# Altium PCB ife18_TS_BMS_Master_STM32.PcbDoc
Units mm, origin at the board's own origin, x right, y up, seen from the top; angles counter-clockwise.
Board outline 106.9 x 63 mm, 2 copper layers (Top Layer, Bottom Layer); 91 components, 78 nets, 391 pads, 110 vias.
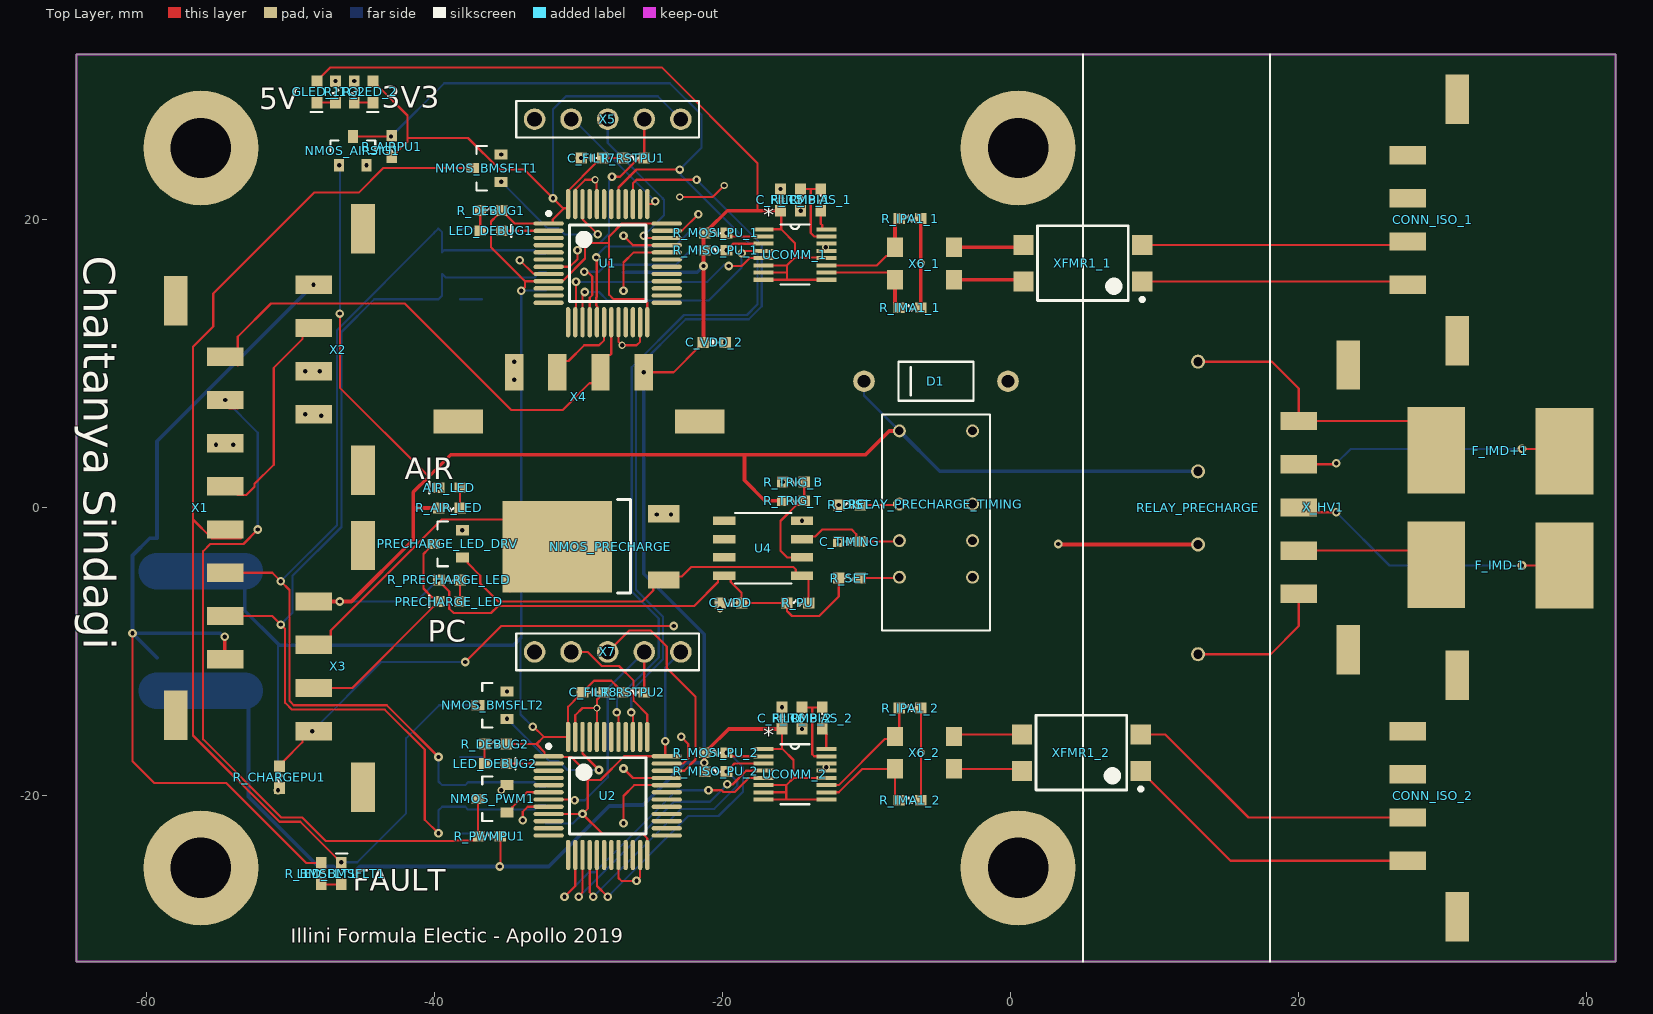
[diagram p0: Top Layer view]
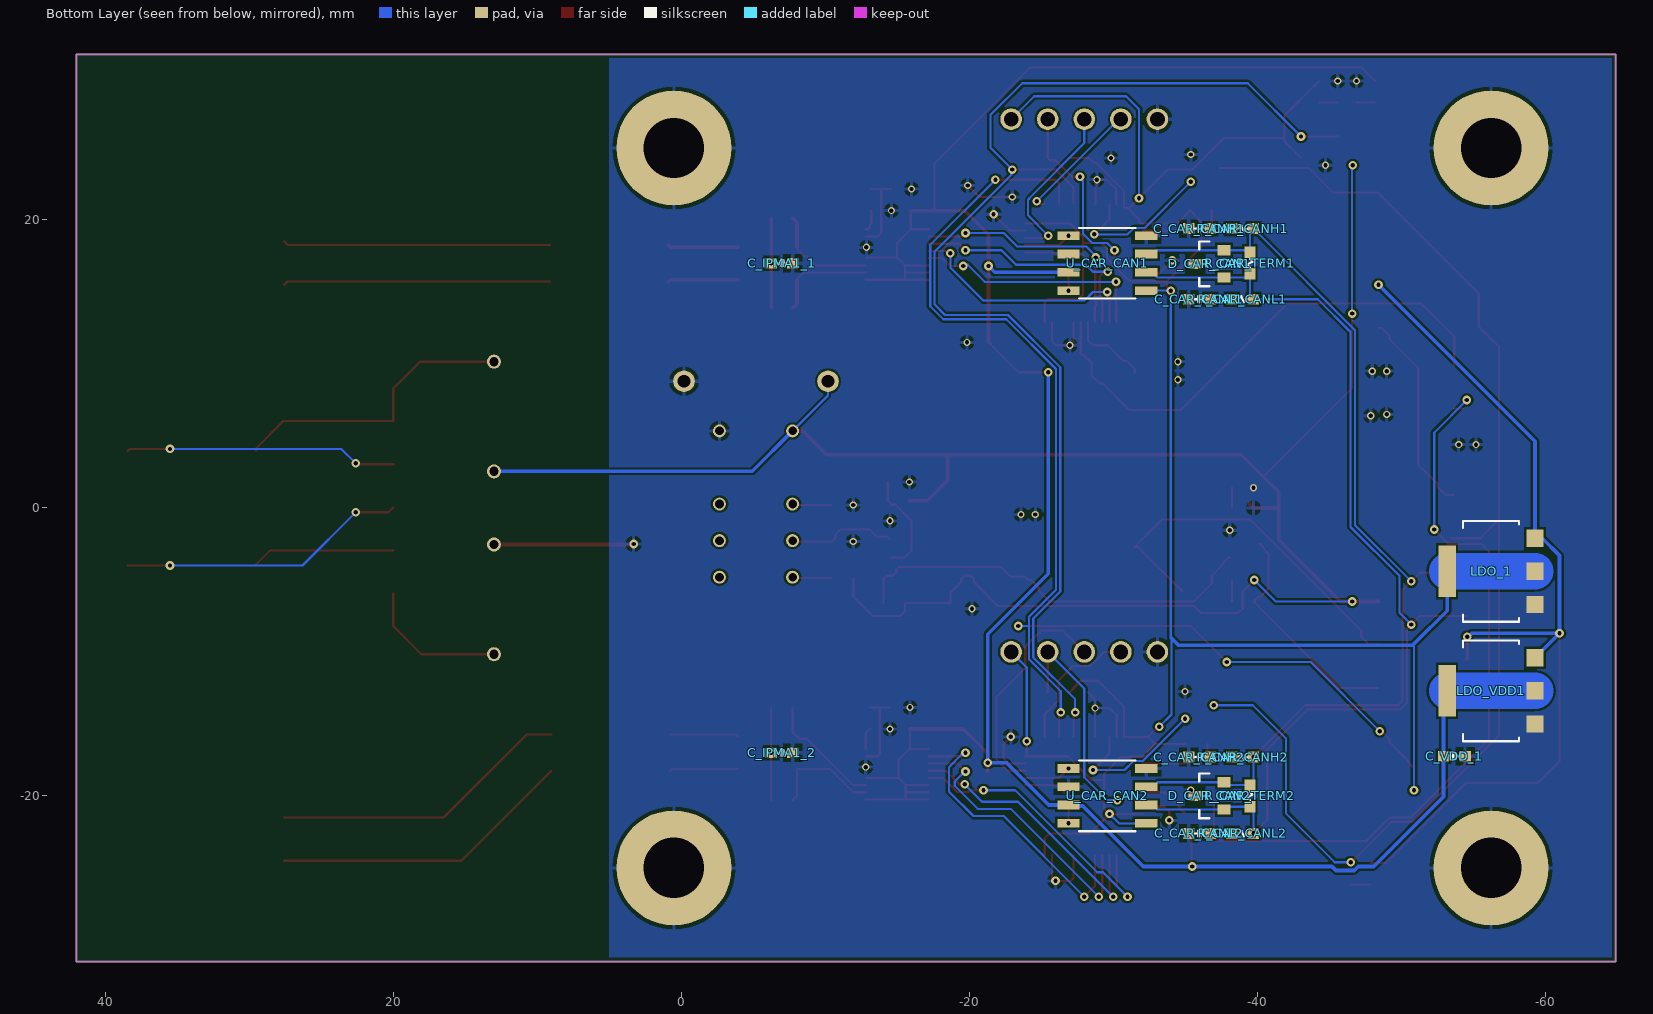
[diagram p1: Bottom Layer view, seen from below]
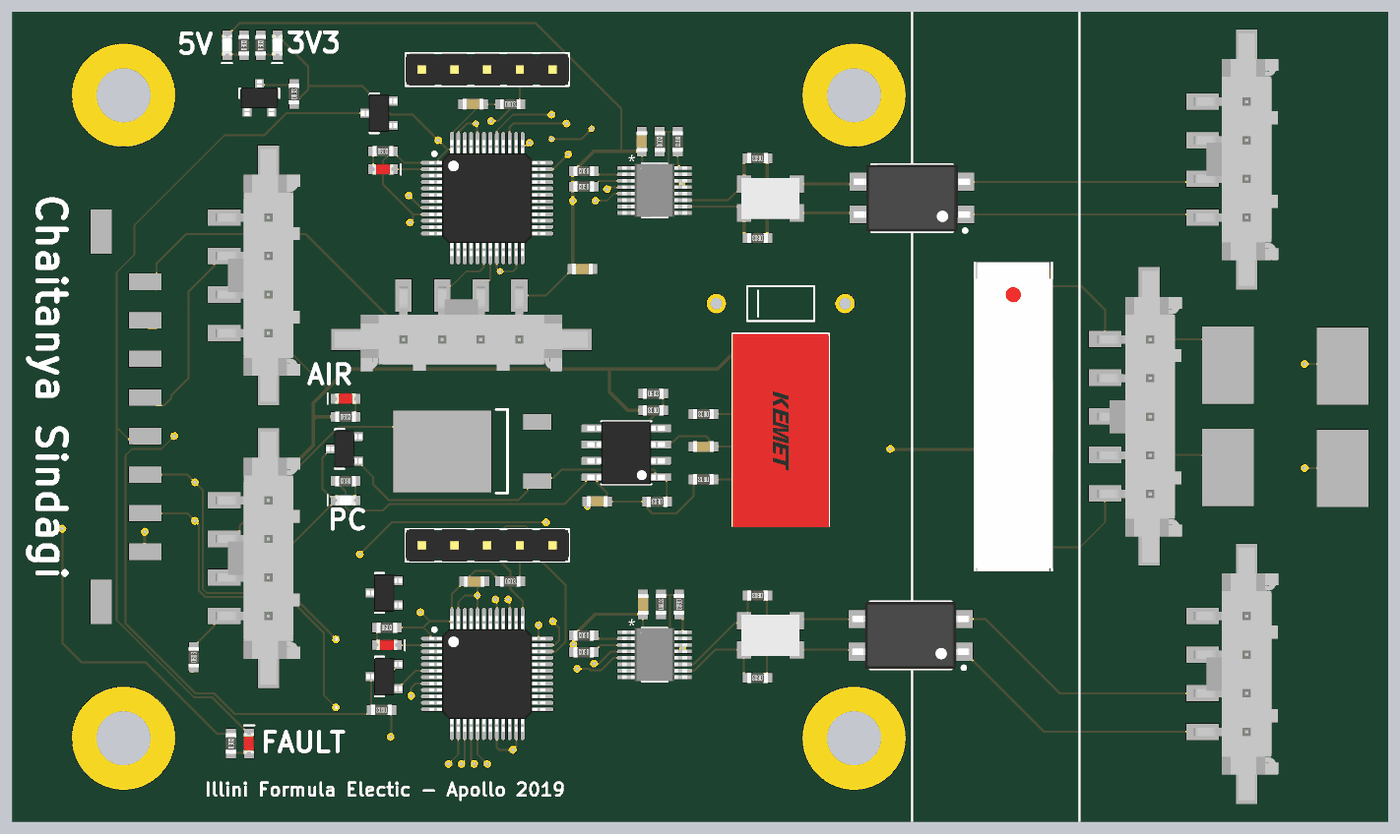
[diagram p2: 3D render of the assembled board from above, using the file's embedded part models]
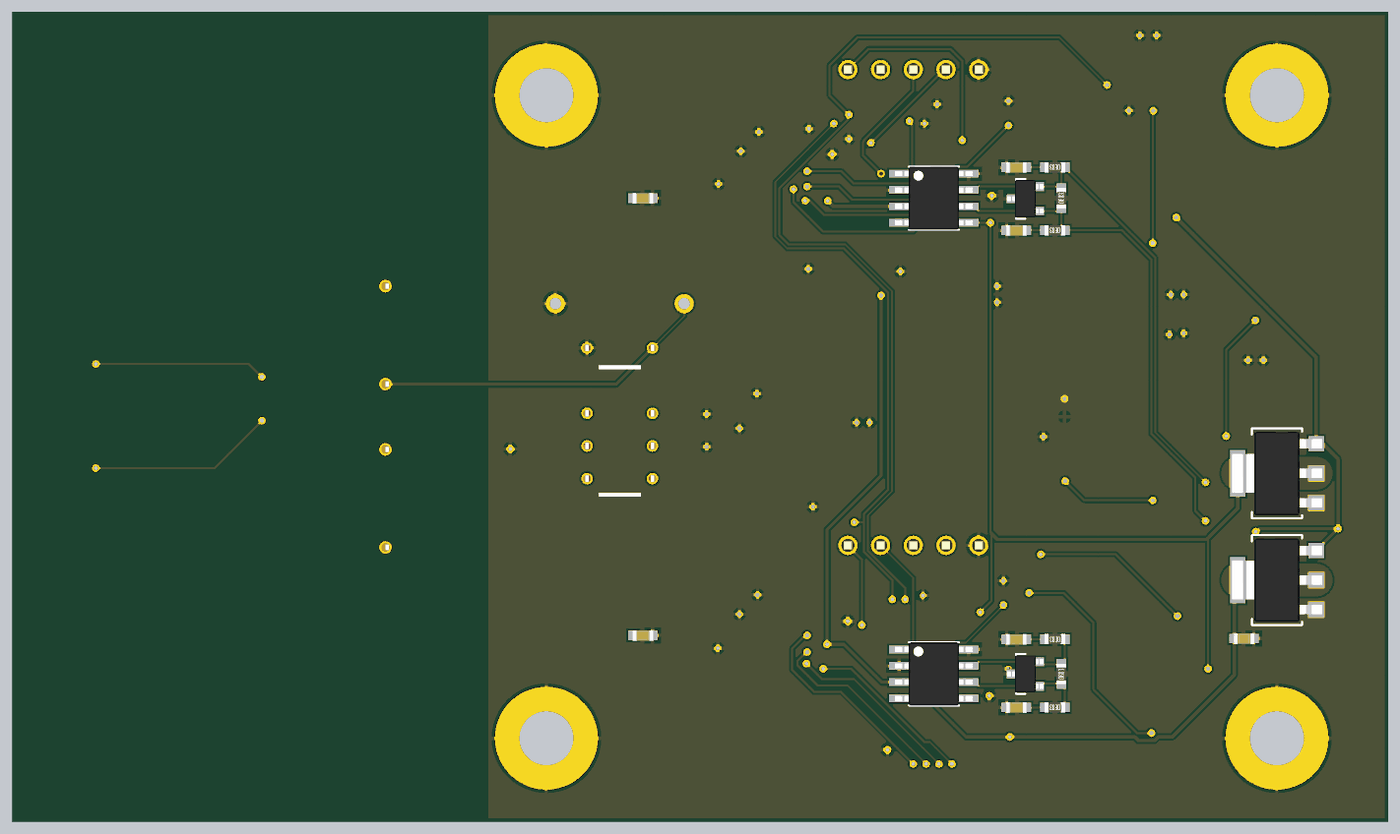
[diagram p3: 3D render of the assembled board from below, using the file's embedded part models]

## Layer stack, top to bottom
Top Solder: solder mask 0.0102, Solder Resist, Dk 3.5
Top Layer: signal copper 0.0356
Dielectric 1: dielectric 0.32, FR-4, Dk 4.8
Bottom Layer: signal copper 0.0356
Bottom Solder: solder mask 0.0102, Solder Resist, Dk 3.5

## Board outline
-64.9,-31.5 -64.9,31.5 42,31.5 42,-31.5

## Design rules (kind name [scope] priority, off if disabled: settings)
BoardOutlineClearance [All] p1: gap=0.2 ignorepadtopadclearanceinfootprint=FALSE
Clearance "Board Outline" [OnLayer('Keep-Out Layer')] p1: gap=0.2 ignorepadtopadclearanceinfootprint=FALSE
Clearance "Tractive Net Class" [InNetClass('Tractive')] p2: gap=0.8 ignorepadtopadclearanceinfootprint=FALSE
Clearance [NOT InNetClass('Tractive')] p3: gap=0.152 ignorepadtopadclearanceinfootprint=FALSE
HoleSize [All] p1: absolutevalues=TRUE maxlimit=6.3 minlimit=0.3 maxpercent=80.000 minpercent=20.000
MinimumAnnularRing [All] p1: minimumring=0.076
MinimumSolderMaskSliver [All] p1: minsoldermaskwidth=0
PolygonConnect "SOT223 Planes" [HasFootprint('SOT223')] p1: connectstyle=Direct reliefconductorwidth=0.254 reliefentries=4 polygonreliefangle="90 Angle" airgapwidth=0.254
PolygonConnect [All] p2: connectstyle=Relief reliefconductorwidth=0.254 reliefentries=4 polygonreliefangle="90 Angle" airgapwidth=0.254
RoutingVias [All] p1: holewidth=0.3 width=0.6 viastyle="Through Hole" minholewidth=0.3 minwidth=0.6 maxholewidth=6.3 maxwidth=10
SilkToSilkClearance [All] p1: silktosilkclearance=0
SilkToSolderMaskClearance [IsPad] p1: minsilkscreentomaskgap=0 clearancetoexposedcopper=TRUE
SolderMaskExpansion [All] p1: expansion=0.051
Width [All] p1: maxlimit=2.54 minlimit=0.152 preferedwidth=0.254
26 further rules are at their usual default settings.

## Classes and differential pairs
component class 2: C_IPMA1_2 C_VDD_2 CONN_ISO_2 R_IBIAS_2 R_ICMP_2 R_IMA1_2 R_IPA1_2 R_MISO_PU_2 R_MOSI_PU_2 UCOMM_2 X6_2 XFMR1_2
component class 1: C_IPMA1_1 C_VDD_1 CONN_ISO_1 R_IBIAS_1 R_ICMP_1 R_IMA1_1 R_IPA1_1 R_MISO_PU_1 R_MOSI_PU_1 UCOMM_1 X6_1 XFMR1_1
component class Master: C_CAR_CANH1 C_CAR_CANH2 C_CAR_CANL1 C_CAR_CANL2 C_FILT5 C_FILT6 C_FILT7 C_FILT8 D_CAR_CAN1 D_CAR_CAN2 F_IMD+1 F_IMD-1 GLED_1 GLED_2 LDO_1 LDO_VDD1 LED_BMSFLT1 LED_DEBUG1 LED_DEBUG2 NMOS_AIRSIG1 NMOS_BMSFLT1 NMOS_BMSFLT2 NMOS_PWM1 R_1 R_2 R_AIRPU1 R_BMSFLT1 R_CAR_CANH1 R_CAR_CANH2 R_CAR_CANL1 R_CAR_CANL2 R_CAR_TERM1 R_CAR_TERM2 R_CHARGEPU1 R_DEBUG1 R_DEBUG2 R_PWMPU1 R_RSTPU1 R_RSTPU2 U1 U2 U_CAR_CAN1 U_CAR_CAN2 X1 X2 X3 X4 X5 X7 X_HV1
channel class Comms: U_Comms1 U_Comms2
net class Tractive: HV+ HV- IM_ISO_1 IM_ISO_2 IMD+ IMD- IP_ISO_1 IP_ISO_2 Precharge+
component class U_Precharge: AIR_LED C_TIMING C_VDD D1 NMOS_PRECHARGE PRECHARGE_LED PRECHARGE_LED_DRV R_AIR_LED R_DIST R_PRECHARGE_LED R_PU R_SET R_TRIG_B R_TRIG_T RELAY_PRECHARGE RELAY_PRECHARGE_TIMING U4

## Components (designator, comment, footprint, x,y, rotation, side; value= is the part's Value field where it differs from the comment)
AIR_LED "" LEDRED-0603 -39,1.4 r180 top
C_CAR_CANH1 "560p" CAP-0603 -36,19.4 r0 bottom
C_CAR_CANH2 "560p" CAP-0603 -36,-17.3 r0 bottom
C_CAR_CANL1 "560p" CAP-0603 -36,14.5 r0 bottom
C_CAR_CANL2 "560p" CAP-0603 -36,-22.6 r0 bottom
C_FILT5 "1u" CAP-0603 -16,21.4 r270 top
C_FILT6 "1u" CAP-0603 -15.9,-14.6 r270 top
C_FILT7 "1u" CAP-0603 -29.1,24.3 r0 top
C_FILT8 "1u" CAP-0603 -29,-12.8 r180 top
C_IPMA1_1 "CAP 10n" CAP-0603 -7,17 r0 bottom (schematic designator C_IPMA1)
C_IPMA1_2 "CAP 10n" CAP-0603 -7,-17 r0 bottom (schematic designator C_IPMA1)
C_TIMING "33u" CAP-0603 -11.2,-2.33 r0 top
C_VDD "1u" CAP-0603 -19.45,-6.6 r0 top
C_VDD_1 "1u" CAP-0603 -53.7,-17.25 r0 bottom (schematic designator C_VDD)
C_VDD_2 "1u" CAP-0603 -20.6,11.5 r180 top (schematic designator C_VDD)
CONN_ISO_1 "Molex - Micro-Fit 3.0 Series connector,  3.00mm (0.118\") pitch header, 4 positions." 43650-0424 31,20 r90 top (schematic designator CONN_ISO)
CONN_ISO_2 "Molex - Micro-Fit 3.0 Series connector,  3.00mm (0.118\") pitch header, 4 positions." 43650-0424 31,-20 r90 top (schematic designator CONN_ISO)
D1 "" DO41-10 -5.2,8.8 r180 top
D_CAR_CAN1 "DIODE-SOT23_PESD1CAN" SOT23 -36.7,16.95 r90 bottom
D_CAR_CAN2 "DIODE-SOT23_PESD1CAN" SOT23 -36.7,-20 r90 bottom
F_IMD+1 "FUSE_885" FUSE_885 34,4 r0 top
F_IMD-1 "FUSE_885" FUSE_885 34,-4 r180 top
GLED_1 "" LEDGREEN-0603 -48.2,28.9 r270 top
GLED_2 "" LEDGREEN-0603 -44.3,28.9 r270 top
LDO_1 "3V3" SOT223 -56.25,-4.4 r90 bottom
LDO_VDD1 "5V" SOT223 -56.25,-12.7 r90 bottom
LED_BMSFLT1 "LEDRED-0603" LEDRED-0603 -46.5,-25.4 r90 top
LED_DEBUG1 "LEDRED-0603" LEDRED-0603 -36.1,19.25 r0 top
LED_DEBUG2 "LEDRED-0603" LEDRED-0603 -35.8,-17.749 r0 top
NMOS_AIRSIG1 "NMOS-SOT23" SOT23 -45.7,24.8 r0 top
NMOS_BMSFLT1 "NMOS-SOT23" SOT23 -36.4,23.6 r90 top
NMOS_BMSFLT2 "NMOS-SOT23" SOT23 -36,-13.7 r90 top
NMOS_PRECHARGE "NMOS-TO252" TO252 -31.509,-2.721 r90 top
NMOS_PWM1 "NMOS-SOT23" SOT23 -36,-20.2 r90 top
PRECHARGE_LED "" LEDGREEN-0603 -39,-6.5 r180 top
PRECHARGE_LED_DRV "" SOT23 -39.1,-2.5 r90 top
R_1 "200" RES-0603 -46.9,28.9 r90 top
R_2 "200" RES-0603 -45.6,28.9 r90 top
R_AIR_LED "1K" RES-0603 -39,0 r0 top
R_AIRPU1 "10K" RES-0603 -43,25.1 r90 top
R_BMSFLT1 "860" RES-0603 -47.9,-25.4 r90 top
R_CAR_CANH1 "100" RES-0603 -39,19.4 r0 bottom
R_CAR_CANH2 "100" RES-0603 -39,-17.3 r0 bottom
R_CAR_CANL1 "100" RES-0603 -39,14.5 r0 bottom
R_CAR_CANL2 "100" RES-0603 -39,-22.6 r0 bottom
R_CAR_TERM1 "120" RES-0603 -39.5,17 r90 bottom
R_CAR_TERM2 "120" RES-0603 -39.5,-20 r90 bottom
R_CHARGEPU1 "10K" RES-0603 -50.8,-18.7 r90 top
R_DEBUG1 "860" RES-0603 -36.1,20.65 r0 top
R_DEBUG2 "860" RES-0603 -35.8,-16.4 r0 top
R_DIST "1.5K" RES-0603 -11.2,0.21 r180 top
R_IBIAS_1 "1.2K" RES-0603 -13.2,21.4 r270 top (schematic designator R_IBIAS)
R_IBIAS_2 "1.2K" RES-0603 -13.1,-14.6 r270 top (schematic designator R_IBIAS)
R_ICMP_1 "800" RES-0603 -14.6,21.4 r90 top (schematic designator R_ICMP)
R_ICMP_2 "800" RES-0603 -14.5,-14.6 r90 top (schematic designator R_ICMP)
R_IMA1_1 "60.4" RES-0603 -7,13.9 r180 top (schematic designator R_IMA1)
R_IMA1_2 "60.4" RES-0603 -7,-20.3 r180 top (schematic designator R_IMA1)
R_IPA1_1 "60.4" RES-0603 -7,20.1 r180 top (schematic designator R_IPA1)
R_IPA1_2 "60.4" RES-0603 -7,-13.9 r180 top (schematic designator R_IPA1)
R_MISO_PU_1 "1K" RES-0603 -20.5,17.9 r180 top (schematic designator R_MISO_PU)
R_MISO_PU_2 "1K" RES-0603 -20.5,-18.3 r180 top (schematic designator R_MISO_PU)
R_MOSI_PU_1 "1K" RES-0603 -20.5,19.1 r180 top (schematic designator R_MOSI_PU)
R_MOSI_PU_2 "1K" RES-0603 -20.5,-17 r180 top (schematic designator R_MOSI_PU)
R_PRECHARGE_LED "1K" RES-0603 -39,-5 r180 top
R_PU "10K" RES-0603 -14.8,-6.6 r180 top
R_PWMPU1 "10K" RES-0603 -36.2,-22.8 r180 top
R_RSTPU1 "10K" RES-0603 -26.21,24.3 r0 top
R_RSTPU2 "10K" RES-0603 -26.21,-12.8 r0 top
R_SET "220K" RES-0603 -11.2,-4.87 r180 top
R_TRIG_B "6.3K" RES-0603 -15.1,1.8 r0 top
R_TRIG_T "3.7K" RES-0603 -15.1,0.5 r180 top
RELAY_PRECHARGE "COTO9104" 9104-SIP4 13,0 r270 top
RELAY_PRECHARGE_TIMING "" RELAY-DPDT_EC2 -5.2,-1 r270 top
U1 "IC-LQFP48_STM32F103C8T6" STM-LQFP48_M -28,17 r0 top
U2 "IC-LQFP48_STM32F103C8T6" STM-LQFP48_M -28,-20 r0 top
U4 "" SOIC8 -17.2,-2.8 r90 top
U_CAR_CAN1 "IC-SOIC8_MCP2562" SOIC8 -29.6,17 r270 bottom
U_CAR_CAN2 "IC-SOIC8_MCP2562" SOIC8 -29.6,-20 r270 bottom
UCOMM_1 "IC-MSOP16_LTC6820" MSOP16 -15,17.6 r0 top (schematic designator UCOMM)
UCOMM_2 "IC-MSOP16_LTC6820" MSOP16 -15,-18.5 r0 top (schematic designator UCOMM)
X1 "Molex - Micro-Fit 3.0 Series connector,  3.00mm (0.118\") pitch header, 8 positions." 43650-0824 -58,0 r270 top
X2 "Molex - Micro-Fit 3.0 Series connector,  3.00mm (0.118\") pitch header, 4 positions." 43650-0424 -45,11 r90 top
X3 "Molex - Micro-Fit 3.0 Series connector,  3.00mm (0.118\") pitch header, 4 positions." 43650-0424 -45,-11 r90 top
X4 "Molex - Micro-Fit 3.0 Series connector,  3.00mm (0.118\") pitch header, 4 positions." 43650-0424 -30,6 r0 top
X5 "" POS5_254MM_MALE -28,27 r180 top
X6_1 "SRF4532-101Y" SRF4532 -6,16.975 r0 top (schematic designator X6)
X6_2 "SRF4532-101Y" SRF4532 -6,-17 r0 top (schematic designator X6)
X7 "" POS5_254MM_MALE -28,-10 r180 top
X_HV1 "Molex - Micro-Fit 3.0 Series connector,  3.00mm (0.118\") pitch header, 5 positions." 43650-0524 23.5,0 r90 top
XFMR1_1 "ESMIT-4180/A" ISOXFMR_ESMIT4180 5,17 r180 top (schematic designator XFMR1)
XFMR1_2 "ESMIT-4180/A" ISOXFMR_ESMIT4180 4.9,-17 r180 top (schematic designator XFMR1)

## Footprints (in the part's own frame and the unit in brackets; to place one, negate y for a bottom-side part, rotate by r counter-clockwise, add the part's x,y. Pads: shape width x height; smd on the part's side, far side on the other; paste and mask are expansions set on the pad)
9104-SIP4 [mm]
  round 0.975 / inner round 1.524 / far side round 0.975 hole 0.65: 1(-10.16,0) 3(-2.54,0) 5(2.54,0) 7(10.16,0)
  body extent -12.03,-3.23 12.03,2.97, height 8.14
43650-0424 [mm]
  rect 1.27x2.54 smd: P$1(4.5,3.43) P$2(1.5,3.43) P$3(-1.5,3.43) P$4(-4.5,3.43)
  rect 3.43x1.65 smd: TAB1(8.39,0) TAB2(-8.39,0)
  body extent -9.82,-2.47 9.83,4.1, height 9.95
43650-0524 [mm]
  rect 1.27x2.54 smd: P$1(6.036,3.503) P$2(3.036,3.503) P$3(0.036,3.503) P$4(-2.964,3.503) P$5(-5.964,3.503)
  rect 3.43x1.65 smd: TAB1(9.926,0.073) TAB2(-9.854,0.073)
  body extent -11.32,-2.47 11.32,4.1, height 9.95
43650-0824 [mm]
  rect 1.27x2.54 smd: P$1(10.5,3.43) P$2(7.5,3.43) P$3(4.5,3.43) P$4(1.5,3.43) P$5(-1.5,3.43) P$6(-4.5,3.43) P$7(-7.5,3.43) P$8(-10.5,3.43)
  rect 3.43x1.65 smd: TAB1(14.39,0) TAB2(-14.39,0)
CAP-0603 [mm]
  rect 0.8x0.75 smd: 1(-0.75,0) 2(0.75,0)
  silkscreen extent -0.3,-0.2 0.3,0.2, body extent -0.8,-0.4 0.8,0.42, height 0.81
DO41-10 [mm]
  round 1.5 hole 0.9: A(-5,0) K(5,0)
  silkscreen extent -2.6,-1.35 2.6,1.35, body extent -2.6,-1.34 2.6,1.35, height 2.85
FUSE_885 [mm]
  rect 4x6 smd: 1(-4.45,0) 2(4.45,-0.05)
  body extent -5.45,-2.4 5.45,2.4, height 4.95
ISOXFMR_ESMIT4180 [mm]
  rect 1.4x1.4 smd: 1(-4.125,1.27) 2(-4.125,-1.27) 3(4.125,-1.27) 4(4.125,1.27)
  silkscreen extent -4.25,-2.6 3.15,2.64, body extent -4.54,-2.6 4.54,2.6, height 3.5
LEDGREEN-0603 [mm]
  rect 0.8x0.75 smd: A(-0.75,0) K(0.75,0)
  silkscreen extent 1.4,-0.42 1.4,0.38, body extent -0.8,-0.4 0.8,0.4, height 0.53
LEDRED-0603 [mm]
  rect 0.8x0.75 smd: A(-0.75,0) K(0.75,0)
  silkscreen extent 1.4,-0.42 1.4,0.38, body extent -0.8,-0.4 0.8,0.4, height 0.53
MSOP16 [mil]
  rect 55x11 smd: 1(-86,68.95) 2(-86,49.25) 3(-86,29.55) 4(-86,9.85) 5(-86,-9.85) 6(-86,-29.55) 7(-86,-49.25) 8(-86,-68.95) 9(86,-68.95) 10(86,-49.25) 11(86,-29.55) 12(86,-9.85) 13(86,9.85) 14(86,29.55) 15(86,49.25) 16(86,68.95)
  silkscreen extent -39,-82 39,82, body extent -99,-81 100,82, height 43
POS5_254MM_MALE [mm]
  round 1.5 hole 1.02: P$1(-5.08,0) P$2(-2.54,0) P$3(0,0) P$4(2.54,0) P$5(5.08,0)
  silkscreen extent -6.35,-1.27 6.35,1.27, body extent -6.35,-1.24 6.35,1.25, height 8.54
RELAY-DPDT_EC2 [mm]
  round 0.9 / inner round 1.524 / far side round 0.9 hole 0.6: 1(-6.35,2.54) 3(-1.27,2.54) 4(1.27,2.54) 5(3.81,2.54) 8(3.81,-2.54) 9(1.27,-2.54) 10(-1.27,-2.54) 12(-6.35,-2.54)
  silkscreen extent -7.5,-3.75 7.5,3.75, body extent -7.4,-3.75 7.6,3.75, height 8.9
RES-0603 [mm]
  rect 0.8x0.75 smd: 1(-0.75,0) 2(0.75,0)
  silkscreen extent -0.3,-0.2 0.3,0.2, body extent -0.8,-0.4 0.8,0.4, height 0.44
SOIC8 [mm]
  rect 0.6x1.55 smd: 1(-1.905,-2.7) 2(-0.635,-2.7) 3(0.635,-2.7) 4(1.905,-2.7) 5(1.905,2.7) 6(0.635,2.7) 7(-0.635,2.7) 8(-1.905,2.7)
  silkscreen extent -2.45,-1.95 2.45,1.95, body extent -2.45,-3.01 2.45,3.01, height 1.5
SOT23 [mm]
  rect 0.7x0.9 smd: 1(-0.95,-1) 2(0.95,-1) 3(0,1)
  silkscreen extent -1.55,0 1.55,0.71, body extent -1.45,-1.41 1.45,1.41, height 1.5
SOT223 [mm]
  rect 1.2x1.2 smd: 1(-2.3,-3.05) 2(0,-3.05) 3(2.3,-3.05)
  rect 3.6x1.2 smd: 4(0,3.05)
  silkscreen extent -3.5,-1.95 3.5,1.95, body extent -3.25,-3.52 3.25,3.5, height 1.8
SRF4532 [mm]
  rect 1.1x1.35 smd: 1(-2.05,-1.125) 2(2.05,-1.125) 3(2.05,1.125) 4(-2.05,1.125)
  body extent -2.25,-1.6 2.25,1.6, height 2.8
STM-LQFP48_M [mm] "QFP, 48-Leads, Body 7x7mm, Pitch 0.5mm, IPC Low Density"
  oval 2.1x0.3 smd: 1(-4.1,2.75) 2(-4.1,2.25) 3(-4.1,1.75) 4(-4.1,1.25) 5(-4.1,0.75) 6(-4.1,0.25) 7(-4.1,-0.25) 8(-4.1,-0.75) 9(-4.1,-1.25) 10(-4.1,-1.75) 11(-4.1,-2.25) 12(-4.1,-2.75) 25(4.1,-2.75) 26(4.1,-2.25) 27(4.1,-1.75) 28(4.1,-1.25) 29(4.1,-0.75) 30(4.1,-0.25) 31(4.1,0.25) 32(4.1,0.75) 33(4.1,1.25) 34(4.1,1.75) 35(4.1,2.25) 36(4.1,2.75)
  oval 0.3x2.1 smd: 13(-2.75,-4.1) 14(-2.25,-4.1) 15(-1.75,-4.1) 16(-1.25,-4.1) 17(-0.75,-4.1) 18(-0.25,-4.1) 19(0.25,-4.1) 20(0.75,-4.1) 21(1.25,-4.1) 22(1.75,-4.1) 23(2.25,-4.1) 24(2.75,-4.1) 37(2.75,4.1) 38(2.25,4.1) 39(1.75,4.1) 40(1.25,4.1) 41(0.75,4.1) 42(0.25,4.1) 43(-0.25,4.1) 44(-0.75,4.1) 45(-1.25,4.1) 46(-1.75,4.1) 47(-2.25,4.1) 48(-2.75,4.1)
  silkscreen extent -4.22,-2.65 2.65,3.57, body extent -4.51,-4.51 4.51,4.51, height 1.55
TO252 [mm]
  rect 1.2x2.2 smd: 1(-2.279,-7.409) 3(2.321,-7.409)
  rect 6.35x7.62 smd: 2(0.021,-0.009)
  silkscreen extent -3.2,-5.09 3.3,-4.2, body extent -3.22,-7.29 3.28,1.41, height 2.3

## Part data
AIR_LED: library part LEDRED-0603
C_CAR_CANH1 C_CAR_CANH2 C_CAR_CANL1 C_CAR_CANL2 C_FILT5 C_FILT6 C_FILT7 C_FILT8 C_TIMING C_VDD C_VDD_1 C_VDD_2: library part CAP-0603
C_IPMA1_1 C_IPMA1_2: library part CAP-0603, "CAP-0603"
CONN_ISO_1 CONN_ISO_2 X2 X3 X4: library part POS4_MF43650-0424, Package=43650-0424, DeviceName=43650-0424, DeviceSetName=HEADER_POS4_?, GateName_1=G$1, LibraryName="MOLEX Micro-Fit", SymbolName_1=HEADER_POS4
D1: library part DIODE-DO41-10
GLED_1 GLED_2 PRECHARGE_LED: library part LEDGREEN-0603
LDO_1 LDO_VDD1: library part LDO-SOT223_SPX1117
NMOS_PRECHARGE: Package=TO252, DeviceSetName=DMP10H400SK3-13, GateName_1=G$1, LibraryName=IFE_Transistors, SymbolName_1=LABELED-PMOS
PRECHARGE_LED_DRV: library part NMOS-SOT23
R_1 R_2 R_AIR_LED R_AIRPU1 R_BMSFLT1 R_CAR_CANH1 R_CAR_CANH2 R_CAR_CANL1 R_CAR_CANL2 R_CAR_TERM1 R_CAR_TERM2 R_CHARGEPU1 R_DEBUG1 R_DEBUG2 R_DIST R_IBIAS_1 R_IBIAS_2 R_ICMP_1 R_ICMP_2 R_IMA1_1 R_IMA1_2 R_IPA1_1 R_IPA1_2 R_MISO_PU_1 R_MISO_PU_2 R_MOSI_PU_1 R_MOSI_PU_2 R_PRECHARGE_LED R_PU R_PWMPU1 R_RSTPU1 R_RSTPU2 R_SET R_TRIG_B R_TRIG_T: library part RES-0603
RELAY_PRECHARGE: Package=9104-SIP4, DeviceSetName=COTO9104, GateName_1=G$1, LibraryName=Discharge_Components_Altium_Export, SymbolName_1=SPST_REED
RELAY_PRECHARGE_TIMING: library part RELAY_EC2, Package=DPDT_2.54, DeviceSetName=EC2, GateName_1=G$1, LibraryName=KEMET, SymbolName_1=MONOSTABLERELAY
U1 U2: I/Os (High Current)=37, Operating Frequency(F) (Processor speed) (MHz)=72, PartNumber=STM32F103C8T6, Supplier Part Number 1=497-6063-ND, Supply Voltage(Vcc) min (V)=2, A/D Converter="2x12-bit (10 Channel)", ComponentLink1Description="Manufacturer URL", ComponentLink1URL=http://www.st.com/web/en/home.html, ComponentLink2Description=Datasheet, ComponentLink2URL=http://www.st.com/st-web-ui/static/active/en/resource/technical/document/datasheet/CD00161566.pdf, ComponentLink3Description="Package Specification", ComponentLink3URL=http://www.st.com/st-web-ui/static/active/en/resource/technical/document/datasheet/DM00058181.pdf, Core="ARM Cortex-M3", DatasheetVersion="Rev. 16", FLASH Size (Prog) (kB)=64, Internal RAM Size (kB)=20, Mounting Technology="Surface Mount", PackageDescription="48-Pin Low Profile Quad Flat Package, 7 x 7 mm Body, 0.5 mm Pitch", PackageReference=LQFP48, PackageVersion="Rev. 6, 06/2013", Packing=Tray, Supplier 1=Digi-Key, Supplier 2=Farnell, Supplier 3=Newark, Supplier 4=Newark, Supplier 5=Mouser, Supplier Part Number 2=1447637, Supplier Part Number 3=59M2182, Supplier Part Number 4=57P1222, Supplier Part Number 5=511-STM32F103C8T6
U4: library part IC-SOIC8_LM393
X1: library part HEADER_POS8_?43650-0824, Package=43650-0824, DeviceName=43650-0824, DeviceSetName=HEADER_POS8_?, GateName_1=G$1, LibraryName="MOLEX Micro-Fit", SymbolName_1=HEADER_POS8
X5 X7: library part POS5_254MM_MALE, Package=43650-0524, DeviceName=43650-0524, DeviceSetName=HEADER_POS5_?, GateName_1=G$1, LibraryName="MOLEX Micro-Fit", SymbolName_1=HEADER_POS5
X6_1 X6_2: library part CMC_SRF4532
X_HV1: library part POS5_MF43650-0524, Package=43650-0524, DeviceName=43650-0524, DeviceSetName=HEADER_POS5_?, GateName_1=G$1, LibraryName="MOLEX Micro-Fit", SymbolName_1=HEADER_POS5
XFMR1_1 XFMR1_2: library part ISOXFMR_ESMIT4180

## Free pads (board coordinates)
  round 8 hole 4.2: 8(-56.25,-25) 8(0.5,-25) 9(-56.25,25) 9(0.5,25)

## Via types
v1: diameter 0.6, hole 0.3, Top Layer to Bottom Layer, 74 vias
v2: diameter 0.5, hole 0.3, Top Layer to Bottom Layer, 36 vias

## Nets (pads, with @x,y where several pads share a name; then routed paths per layer and width w, separated by ;. In a path a pad name is that pad's centre, name@x,y a point inside that pad or via, vN(x,y) a via of type N, cw(c..) or ccw(c..) an arc to the next point about the centre after c; other vN are vias at no path point)
3V3: C_FILT7.2 C_FILT8.2 GLED_2.A LDO_1.2 LDO_1.4 R_AIRPU1.1 R_CHARGEPU1.1 R_DEBUG1.2 R_DEBUG2.2 R_RSTPU1.1 R_RSTPU2.1 U1.1 U1.9 U1.24 U1.36 U1.48 U2.1 U2.9 U2.24 U2.36 U2.48 U_CAR_CAN1.5 U_CAR_CAN2.5 X5.P$1 X7.P$1 | length 191.4
  Top Layer w0.152: GLED_2.A -44.3,29.625 -44.001,29.326 -43.976,29.326 -41.9,27.25 -41.9,25.7 ; R_AIRPU1.1 -43,24.375 -42.701,24.674 -42.676,24.674 -41.9,25.45 -41.9,25.7 ; R_DEBUG2.2 -32.95,-16.4 ; v1(-34,15.095) -33.75,15.345 -33.75,15.75 ; v1(-33.2,-15.2) -33.15,-15.2 -32.45,-15.9 ; U2.9 v1(-29.75,-21.25) ; R_RSTPU2.1 -26.985,-12.8 -27.284,-12.501 -27.284,-12.476 -27.76,-12 -28.95,-12 -29.426,-12.476 -29.426,-12.501 -29.725,-12.8 C_FILT8.2 -29.775,-12.8 -30.074,-13.099 -30.074,-13.124 -30.75,-13.8 U2.48 -32.45,-15.9 ; R_RSTPU1.1 C_FILT7.2 -28.649,24.001 -28.784,24.001 -30.75,22.035 U1.48 -30.75,20.879 -30.818,20.811 -31.039,20.811 ; U2.24 -25.25,-22.95 -25.6,-22.6 -28.4,-22.6 v1(-29.75,-21.25) ; U1.24 -25.25,14.25 -25.5,14.5 -27.6,14.5 -27.9,14.8 -27.9,18.4 ; v1(-24,-16.2) -24,-17.182 U2.36@-23.932,-17.25 ; U2.36 U2.36@-23.932,-17.25 ; U1.36 -27.003,19.75 -27.9,18.853 -27.9,18.4 ; -41.9,25.7 -37.7,25.7 -35.5,23.5 -33.8,23.5 v1(-31.8,21.5) -31.111,20.811 -31.039,20.811 ; -33.75,15.75 -36.1,18.1 -36.1,19.9 -35.674,20.326 -35.674,20.351 -35.375,20.65 R_DEBUG1.2 -35.325,20.65 -35.026,20.351 -35.026,20.326 -34.45,19.75 U1.1 -31.879,19.75 -31.811,19.818 -31.811,20.039 -31.039,20.811 ; -33.75,15.75 U1.9 -31.16,15.75 -31.086,15.824 -31.076,15.824 -29.571,17.329 -29.571,18.029 -29.2,18.4 -27.9,18.4 ; -32.95,-16.4 -32.45,-15.9 ; -32.95,-16.4 -32.389,-16.961 -32.389,-17.182 -32.321,-17.25 U2.1 -32.072,-17.278 -31.067,-17.278 -31.046,-17.3 -30.54,-17.3 -29.384,-18.456 -29.384,-18.9 ; v1(-29.75,-21.25) -29.384,-20.884 -29.384,-18.9 ; -29.384,-18.9 -28.5,-18.9 -26.85,-17.25 U2.36@-23.932,-17.25
  Bottom Layer w0.152: -51,-9.336 -50.9,-9.436 v1(-50.9,-19.6) ; v1(-33.2,-15.2) -34.059,-14.341 -34.059,-9.059 -34,-9 v1(-34,15.095) U_CAR_CAN1.5 ; U_CAR_CAN2.5 -30.405,-21.905 v1(-29.75,-21.25) ; v1(-31.8,21.5) -31.8,27.7 -30.9,28.6 -24.52,28.6 X5.P$1 ; v1(-24,-16.2) -24,-11.08 X7.P$1
  Bottom Layer w0.254: LDO_1.4 -53.2,-7.136 -51,-9.336 ; -50.9,-9.436 -50.8,-9.536 -34.536,-9.536 -34.059,-9.059
  Bottom Layer w2.54: LDO_1.2 LDO_1.4
5V: C_FILT5.2 C_FILT6.2 C_VDD_1.2 C_VDD_2.2 GLED_1.A LDO_VDD1.2 LDO_VDD1.4 R_MISO_PU_1.2 R_MISO_PU_2.2 R_MOSI_PU_1.2 R_MOSI_PU_2.2 R_PWMPU1.1 U_CAR_CAN1.3 U_CAR_CAN2.3 UCOMM_1.1 UCOMM_1.6 UCOMM_1.7 UCOMM_1.8 UCOMM_1.9 UCOMM_1.12 UCOMM_2.1 UCOMM_2.6 UCOMM_2.7 UCOMM_2.8 UCOMM_2.9 UCOMM_2.12 X4.P$1 | length 183.3
  Top Layer w0.152: GLED_1.A -48.2,29.675 -47.901,29.974 -47.876,29.974 -47.25,30.6 -24.25,30.6 -17.6,23.95 -17.6,20.65 ; v1(-35.5,-24.9) -35.45,-24.85 R_PWMPU1.1 ; v1(-25.5,9.43) -23.42,9.43 -21.674,11.176 -21.674,11.201 -21.375,11.5 C_VDD_2.2 ; UCOMM_2.8 -15.6,-20.251 UCOMM_2.9 ; UCOMM_2.7 -15.601,-19.751 ; UCOMM_2.6 -15.601,-19.251 ; UCOMM_2.1 -15.851,-16.749 ; UCOMM_1.8 -15.5,15.849 ; UCOMM_1.7 -15.576,16.349 -15.551,16.374 ; UCOMM_1.6 -15.551,16.849 ; UCOMM_1.1 -15.951,19.351 ; C_FILT5.2 -15.951,20.601 -15.951,19.351 ; C_FILT6.2 -15.9,-16.7 -15.851,-16.749 ; -15.601,-20.251 -15.601,-19.751 -15.601,-19.251 ; UCOMM_2.12 -15.1,-18.75 ; UCOMM_1.9 -15.5,15.849 ; UCOMM_1.12 -12.866,17.4 -15,17.4 ; -15.951,19.351 -15,18.4 -15,17.4 ; -15.851,-16.749 -15.1,-17.5 -15.1,-18.75 ; -15.601,-19.251 -15.1,-18.75 ; -15.551,16.374 -15.551,16.849 ; -15.551,16.374 -15.551,15.899 -15.5,15.849 ; -15.551,16.849 -15,17.4
  Top Layer w0.254: C_VDD_2.2 v1(-21.35,16.8) -21.35,19 R_MOSI_PU_1.2 -21.225,19.1 -20.977,19.348 -20.977,19.373 -19.7,20.65 -17.6,20.65 C_FILT5.2 ; R_MISO_PU_2.2 -21.3,-18.25 v1(-21.3,-17.7) -21.3,-17.05 R_MOSI_PU_2.2 -21.225,-17 -20.977,-16.752 -20.977,-16.727 -19.6,-15.35 C_FILT6.2
  Bottom Layer w0.254: LDO_VDD1.4 -52.95,-12.95 C_VDD_1.2 -52.95,-20.05 -48.1,-24.9 -47.019,-24.9 -46.74,-25.179 -45.477,-25.179 -45.197,-24.9 v1(-35.5,-24.9) -32.1,-24.9 -27.9,-20.7 -26.965,-20.7 U_CAR_CAN2.3 -25.535,-20.635 -22.6,-17.7 v1(-21.3,-17.7) -21.3,-8.77 -25.5,-4.57 v1(-25.5,9.43) ; U_CAR_CAN1.3 -21.785,16.365 v1(-21.35,16.8)
  Bottom Layer w2.54: LDO_VDD1.2 LDO_VDD1.4
AIR: C_VDD.2 D1.K NMOS_AIRSIG1.1 R_AIR_LED.1 R_PRECHARGE_LED.2 R_PU.2 R_SET.2 R_TRIG_T.2 RELAY_PRECHARGE.3 RELAY_PRECHARGE_TIMING.12 U4.8 X3.P$1 | length 147.3
  Top Layer w0.152: v1(-46.6,13.5) -46.6,8.35 -40.437,2.187 -40.437,2.163 ; v1(-39.8,-5) -39,-5.8 -39,-7 -38.7,-7.3 -36.1,-7.3 -35.605,-6.805 -22,-6.805 -20.339,-5.144 -20.339,-4.929 -20.116,-4.705 U4.8 -19.684,-4.705 -19.461,-4.929 -19.461,-5.144 -18.7,-5.905 C_VDD.2 R_PU.2 -15.55,-7.15 -15.2,-7.5 -13.3,-7.5 -11.95,-6.15 R_SET.2
  Top Layer w0.254: X3.P$1 v1(-46.6,-6.5) -45.8,-6.5 -41.5,-2.2 -41.5,-0.2 ; R_AIR_LED.1@-39.477,0.273 -39.477,0.248 -39.725,0 R_AIR_LED.1 -41.3,0 -41.5,-0.2 ; R_TRIG_T.2 -17.084,0.5 -18.5,1.916 -18.5,3.7 ; RELAY_PRECHARGE_TIMING.12 -8.45,5.35 -10.1,3.7 -18.5,3.7 ; -41.5,-0.2 -41.5,1.1 -40.437,2.163 -38.9,3.7 -18.5,3.7
  Bottom Layer w0.152: v1(-46.65,23.8) -46.6,23.75 v1(-46.6,13.5) ; v1(-46.6,-6.5) -41.3,-6.5 v1(-39.8,-5) ; D1.K -10.2,7.81 RELAY_PRECHARGE_TIMING.12
  Bottom Layer w0.254: RELAY_PRECHARGE_TIMING.12 -4.93,2.54 RELAY_PRECHARGE.3
AIRSIG: NMOS_AIRSIG1.3 R_AIRPU1.2 U1.41 U2.41 | length 86.9
  Top Layer w0.152: NMOS_AIRSIG1.3 v1(-43.05,25.8) R_AIRPU1.2 ; v1(-27.363,-14.2) -27.363,-14.321 -27.25,-14.434 U2.41 ; U1.41 -27.25,22.25 -26,23.5 v1(-23,23.5)
  Bottom Layer w0.152: v1(-43.05,25.8) -39.35,29.5 -23.684,29.5 -21.484,27.3 -21.484,25.016 v1(-23,23.5) -22.929,23.429 -22.929,23.129 -17.605,17.805 -17.605,14.126 -18.326,13.405 -22.704,13.405 -26.333,9.775 -26.333,-5.801 -24.461,-7.673 -24.461,-10.385 -27.363,-13.287 v1(-27.363,-14.2)
BMS_CS1: U1.14 UCOMM_1.5 | length 16.6
  Top Layer w0.152: U1.14 -30.222,12.928 -30.222,13.933 -30.2,13.954 v1(-30.2,15.7) ; v1(-19.6,16.8) -18.7,16.8 -18.15,17.35 UCOMM_1.5
  Bottom Layer w0.152: v1(-30.2,15.7) -21.091,15.7 -19.905,16.886 -19.686,16.886 v1(-19.6,16.8)
BMS_CS2: U2.14 UCOMM_2.5 | length 20.5
  Top Layer w0.152: v1(-31,-27) -30.25,-26.25 U2.14 ; v1(-21,-19.6) -20.093,-19.6 -19.964,-19.729 -19.179,-19.729 -18.2,-18.75 UCOMM_2.5
  Bottom Layer w0.152: v1(-31,-27) -29.3,-25.3 -28.897,-25.3 -23.197,-19.6 v1(-21,-19.6)
BMS_FLT: LED_BMSFLT1.K NMOS_BMSFLT1.3 NMOS_BMSFLT2.3 X1.P$4 | length 87.7
  Top Layer w0.152: X1.P$4@-53.484,-2.1 -55.5,-2.1 -56.8,-0.8 ; LED_BMSFLT1.K@-46.513,-24.612 -46.799,-24.326 -46.824,-24.326 -49.35,-21.8 -50.8,-21.8 -56.8,-15.8 -56.8,-0.8 ; NMOS_BMSFLT1.3 -43.6,23.6 -45.3,21.9 -48.4,21.9 -55.4,14.9 -55.4,12.6 -56.8,11.2 -56.8,-0.8
  Bottom Layer w0.152: v1(-46.5,-24.6) -45.4,-24.6 -42,-21.2 -42,-16 -39.7,-13.7 v1(-37,-13.7)
BMS_MISO1: R_MISO_PU_1.1 U1.16 UCOMM_1.3 | length 17.2
  Top Layer w0.152: v1(-29.63,16.4) -29.4,16.4 -29.071,16.071 -29.071,14.781 -29.25,14.602 U1.16 ; v1(-19.75,17.9) -19.725,17.9 -19.426,18.199 -19.426,18.224 -19.299,18.351 UCOMM_1.3
  Bottom Layer w0.152: v1(-29.63,16.4) -28.6,16.4 -28.106,16.894 -23.256,16.894 -22.25,17.9 v1(-19.75,17.9)
BMS_MISO2: R_MISO_PU_2.1 U2.16 UCOMM_2.3 | length 20.3
  Top Layer w0.152: U2.16 -29.25,-26.687 -29,-26.937 v1(-29,-27) ; v1(-19.75,-18.3) -19.725,-18.3 -19.426,-18.001 -19.426,-17.976 -19.199,-17.749 UCOMM_2.3
  Bottom Layer w0.152: v1(-29,-27) -22.9,-20.9 -20.6,-20.9 -19,-19.3 -19,-19 -19.7,-18.3 v1(-19.75,-18.3)
BMS_MOSI1: R_MOSI_PU_1.1 U1.17 UCOMM_1.2 | length 17.1
  Top Layer w0.152: v1(-28.8,17.4) -28.767,17.367 -28.767,14.655 -28.8,14.621 -28.8,14.054 -28.7,13.954 -28.722,13.933 -28.722,12.928 U1.17 ; v1(-19.75,19.1) -19.501,18.851 UCOMM_1.2
  Bottom Layer w0.152: v1(-28.8,17.4) -28.8,17.5 -28.136,18.164 -23.336,18.164 -22.4,19.1 v1(-19.75,19.1)
BMS_MOSI2: R_MOSI_PU_2.1 U2.17 UCOMM_2.2 | length 21.6
  Top Layer w0.152: U2.17 -28.75,-26.25 v1(-28,-27) ; v1(-19.75,-17) -19.501,-17.249 UCOMM_2.2
  Bottom Layer w0.152: v1(-28,-27) -22.4,-21.4 -20.3,-21.4 -18.6,-19.7 -18.6,-18 -19.454,-17.146 -19.483,-17.146 -19.629,-17 v1(-19.75,-17)
BMS_SCK1: U1.15 UCOMM_1.4 | length 17.2
  Top Layer w0.152: U1.15 -29.75,15.05 -29.6,15.2 v1(-29.6,15) ; v1(-18.7,17.7) -18.55,17.85 UCOMM_1.4
  Bottom Layer w0.152: v1(-29.6,15) -28.6,15 -28,14.4 -21,14.4 -18.7,16.7 v1(-18.7,17.7)
BMS_SCK2: U2.15 UCOMM_2.4 | length 19.4
  Top Layer w0.152: v1(-30,-27) -30,-26.937 -29.75,-26.687 U2.15 ; v1(-19.7,-19.2) -19.337,-19.2 -18.387,-18.25 UCOMM_2.4
  Bottom Layer w0.152: v1(-30,-27) -23.4,-20.4 -20.9,-20.4 v1(-19.7,-19.2)
CAR_CANRx1: U1.32 U_CAR_CAN1.4 | length 5.2
  Top Layer w0.152: v1(-26.9,15.095) -26.9,17.05 -26.2,17.75 U1.32
CAR_CANRx2: U2.32 U_CAR_CAN2.4 | length 5.2
  Top Layer w0.152: v1(-26.9,-21.9) -26.9,-20 -26.15,-19.25 U2.32
CAR_CANTx1: U1.33 U_CAR_CAN1.1 | length 3.3
  Top Layer w0.152: v1(-26.9,18.905) -26.245,18.25 U1.33
CAR_CANTx2: U2.33 U_CAR_CAN2.1 | length 3.3
  Top Layer w0.152: v1(-26.9,-18.095) -26.245,-18.75 U2.33
CARCANH: D_CAR_CAN1.2 D_CAR_CAN2.2 R_CAR_CANH1.1 R_CAR_CANH2.1 R_CAR_TERM1.2 R_CAR_TERM2.2 U_CAR_CAN1.7 U_CAR_CAN2.7 X1.P$3 | length 72.3
  Top Layer w0.152: X1.P$3 -51.3,-4.5 v1(-50.7,-5.1) -50.1,-5.7 -50.1,-13.4 -49.8,-13.7 -43.35,-13.7 v1(-39.75,-17.3)
  Bottom Layer w0.152: v1(-50.7,-5.1) -46.8,-1.2 -46.8,12.35 -40.074,19.076 -40.074,19.101 -39.775,19.4 R_CAR_CANH1.1 -39.5,19.15 R_CAR_TERM1.2 -39.35,17.9 D_CAR_CAN1.2 -33.04,17.9 -32.775,17.635 U_CAR_CAN1.7 ; v1(-39.75,-17.3) -39.75,-19 R_CAR_TERM2.2 -37.9,-19.25 D_CAR_CAN2.2 -33.088,-19.05 -32.999,-19.139 -32.999,-19.141 -32.775,-19.365 U_CAR_CAN2.7
CARCANL: D_CAR_CAN1.1 D_CAR_CAN2.1 R_CAR_CANL1.1 R_CAR_CANL2.1 R_CAR_TERM1.1 R_CAR_TERM2.1 U_CAR_CAN1.6 U_CAR_CAN2.6 X1.P$2 | length 75.4
  Top Layer w0.152: X1.P$2 -51.3,-7.5 v1(-50.7,-8.1) -50.7,-8.118 -50.405,-8.413 -50.405,-13.526 -49.926,-14.005 -43.476,-14.005 -40.7,-16.781 -40.7,-21.65 v1(-39.75,-22.6)
  Bottom Layer w0.152: v1(-50.7,-8.1) -49.9,-7.3 -49.9,-4.731 -46.495,-1.326 -46.495,12.224 -44.219,14.5 R_CAR_CANL1.1 -39.5,14.75 R_CAR_TERM1.1 -39.25,16 D_CAR_CAN1.1 -33.088,16 -32.999,16.089 -32.999,16.141 -32.775,16.365 U_CAR_CAN1.6 ; v1(-39.75,-22.6) -39.75,-21 R_CAR_TERM2.1 -37.9,-20.75 D_CAR_CAN2.1 -33.088,-20.95 -32.999,-20.861 -32.999,-20.859 -32.775,-20.635 U_CAR_CAN2.6
CHARGE_EN: R_CHARGEPU1.2 U1.39 U2.39 X3.P$4 | length 86.9
  Top Layer w0.152: R_CHARGEPU1.2 -50.501,-17.651 -50.501,-17.571 -49.204,-16.274 -49.204,-16.059 -48.646,-15.5 v1(-48.525,-15.5) X3.P$4 ; v1(-37.9,-10.7) -35.4,-8.2 v1(-23.42,-8.2) ; v1(-26.37,-14.2) -26.37,-14.321 -26.25,-14.441 U2.39 ; U1.39 -26.25,22.55 -26,22.8 v1(-21.827,22.8)
  Bottom Layer w0.152: v1(-48.525,-15.5) -43.725,-10.7 v1(-37.9,-10.7) ; v1(-26.37,-14.2) -26.37,-12.725 -24.156,-10.511 -24.156,-8.2 ; v1(-23.42,-8.2) -24.156,-8.2 ; v1(-21.827,22.8) -17.3,18.273 -17.3,14 -18.2,13.1 -22.577,13.1 -26.028,9.649 -26.028,-5.674 -24.156,-7.546 -24.156,-8.2
CURR: U1.18 X4.P$3 | length 5.5
  Top Layer w0.152: X4.P$3 -31.5,9.646 -30.941,10.204 -30.726,10.204 -29.63,11.3 -28.6,11.3 -28.25,11.65 U1.18
CURR_HR: U1.19 X1.P$8 X4.P$2 | length 36.3
  Top Layer w0.152: X1.P$8@-53.7,9.9 -53.7,11.89 -51.39,14.2 -42.1,14.2 -34.7,6.8 -31.13,6.8 -29.274,8.656 -29.059,8.656 -28.5,9.214 X4.P$2 -28.5,10.065 -27.941,10.624 -27.839,10.624 -27.75,10.713 U1.19
FAN_PWM: NMOS_PWM1.1 U2.6 | length 3.5
  Top Layer w0.152: NMOS_PWM1.1 -34.9,-21.15 -34.626,-20.876 -34.626,-20.776 -33.6,-19.75 U2.6
FAN_PWM_5V: NMOS_PWM1.3 R_PWMPU1.2 X1.P$7 | length 52.9
  Top Layer w0.152: X1.P$7@-54.303,6.9 X1.P$7@-53.7,6.9 ; v1(-52.3,-1.5) -53.3,-2.5 -55.6,-2.5 -56.1,-3 -56.1,-16.069 -50.674,-21.495 -49.224,-21.495 -47.59,-23.129 -38.636,-23.129 -38.606,-23.099 -37.249,-23.099 R_PWMPU1.2 -37,-22.75 NMOS_PWM1.3
  Bottom Layer w0.152: v1(-54.57,7.5) -52.3,5.23 v1(-52.3,-1.5)
GND: AIR_LED.K C_CAR_CANH1.2 C_CAR_CANH2.2 C_CAR_CANL1.2 C_CAR_CANL2.2 C_FILT5.1 C_FILT6.1 C_FILT7.1 C_FILT8.1 C_IPMA1_1.1 C_IPMA1_2.1 C_TIMING.1 C_VDD.1 C_VDD_1.1 C_VDD_2.1 D1.A D_CAR_CAN1.3 D_CAR_CAN2.3 LDO_1.1 LDO_VDD1.1 NMOS_AIRSIG1.2 NMOS_BMSFLT1.2 NMOS_BMSFLT2.2 NMOS_PRECHARGE.3 NMOS_PWM1.2 pad.8 pad.9 PRECHARGE_LED_DRV.2 R_1.2 R_2.2 R_DIST.2 R_ICMP_1.1 R_ICMP_2.1 R_TRIG_B.1 RELAY_PRECHARGE.5 RELAY_PRECHARGE_TIMING.1 U1.8 U1.20 U1.23 U1.35 U1.44 U1.47 U2.8 U2.20 U2.23 U2.35 U2.44 U2.47 U4.4 U_CAR_CAN1.2 U_CAR_CAN1.8 U_CAR_CAN2.2 U_CAR_CAN2.8 UCOMM_1.13 UCOMM_1.14 UCOMM_2.13 UCOMM_2.14 X1.P$6 X2.P$3 X2.P$4 X4.P$4 X5.P$5 X7.P$5 | length 44.3
  Top Layer w0.152: v1(-34.1,17.2) -33.178,16.278 -32.128,16.278 U1.8 ; v1(-33.9,-21.7) -33.9,-21.1 -33.55,-20.75 U2.8 ; U2.47 -30.25,-14.4 -29.75,-13.9 v2(-28.75,-13.9) ; U1.47 -30.222,21.128 -30.222,22.133 -29.554,22.8 v2(-28.874,22.8) -28.784,22.711 -28.784,22.139 -28.778,22.133 -28.778,21.128 U1.44 ; U2.44 v2(-28.75,-13.9) ; C_FILT8.1 -28.275,-12.8 -28.574,-13.099 -28.574,-13.124 -28.75,-13.3 v2(-28.75,-13.9) ; U2.20 -27.25,-25.7 -27.05,-25.9 v1(-26,-25.9) -25.75,-25.65 U2.23 ; U1.20 -27.25,11.55 v2(-27,11.3) -26,11.3 -25.75,11.55 U1.23 ; U2.35 -22.75,-17.75 -22.4,-17.4 -22.4,-16.4 v1(-22.9,-15.9) ; U1.35 -23.872,19.278 -22.822,19.278 v1(-21.7,20.4) ; v2(-23,21.6) -20.7,21.6 v2(-19.9,22.4)
  Top Layer w0.254: v1(3.3,-2.5) 3.34,-2.54 RELAY_PRECHARGE.5
  other v2: -35.4,-19.6 -12.818,-18.001 -14.5,-15.35 -15.9,-13.85 -35,-12.75 -20.2,-7 -11.95,-2.33 -38.1,-1.55 -14.5,-0.895 -24.6,-0.45 -23.6,-0.45 -11.95,0.21 -39.75,1.4 -15.85,1.8 -55.2,4.4 -54,4.4 -47.9,6.4 -49,6.5 -34.5,8.9 -49,9.5 -48,9.5 -34.5,10.16 -19.85,11.5 -12.866,18.1 -14.6,20.65 -16,22.15 -44.75,23.8 -29.85,24.3 -35.4,24.55 -46.9,29.65 -45.6,29.65
HV+: F_IMD+1.1 RELAY_PRECHARGE.1 X_HV1.P$1 | length 20.5
  Top Layer w0.152: RELAY_PRECHARGE.1 18.14,10.16 19.997,8.303 X_HV1.P$1 27.626,6.036 29.55,4.113 F_IMD+1.1
HV-: F_IMD-1.2 X_HV1.P$4 | length 10
  Top Layer w0.152: X_HV1.P$4 28.564,-2.964 F_IMD-1.2
IBIAS_1: R_IBIAS_1.2 UCOMM_1.16 | length 1.6
  Top Layer w0.152: R_IBIAS_1.2 -13.2,19.736 -13.095,19.63 -13.095,19.415 -13.031,19.351 UCOMM_1.16
IBIAS_2: R_IBIAS_2.2 UCOMM_2.16 | length 1.5
  Top Layer w0.152: R_IBIAS_2.2 -12.816,-15.634 UCOMM_2.16
ICMP_1: R_IBIAS_1.1 R_ICMP_1.2 UCOMM_1.15 | length 5.6
  Top Layer w0.152: R_ICMP_1.2 -13.9,22.15 ; R_IBIAS_1.1 -13.9,22.15 ; UCOMM_1.15 -12.818,18.853 -13.653,18.853 -13.9,19.1 -13.9,22.15
ICMP_2: R_IBIAS_2.1 R_ICMP_2.2 UCOMM_2.15 | length 5.7
  Top Layer w0.152: R_ICMP_2.2 -13.8,-13.85 ; R_IBIAS_2.1 -13.8,-13.85 ; UCOMM_2.15 -12.818,-17.247 -13.653,-17.247 -13.8,-17.1 -13.8,-13.85
IM_ISO_1: CONN_ISO_1.P$4 XFMR1_1.1 | length 18.5
  Top Layer w0.152: XFMR1_1.1 27.34,15.73 CONN_ISO_1.P$4
IM_ISO_2: CONN_ISO_2.P$4 XFMR1_2.1 | length 21.1
  Top Layer w0.152: XFMR1_2.1 15.255,-24.5 CONN_ISO_2.P$4
IMA_1: R_IMA1_1.2 UCOMM_1.10 X6_1.1 | length 7.1
  Top Layer w0.152: UCOMM_1.10 -8.524,16.349 -8.05,15.875 X6_1.1
  Top Layer w0.254: X6_1.1 -8.05,14.297 -8.023,14.27 -8.023,14.148 -7.775,13.9 R_IMA1_1.2
IMA_2: R_IMA1_2.2 UCOMM_2.10 X6_2.1 | length 7.7
  Top Layer w0.152: UCOMM_2.10 -11.951,-19.751 -10.325,-18.125 X6_2.1 -8.05,-20.001 R_IMA1_2.2
IMD+: F_IMD+1.2 X_HV1.P$2 | length 19
  Top Layer w0.152: X_HV1.P$2 22.536,3.036 v1(22.6,3.1) ; v1(35.5,4.1) 38.3,4.1 F_IMD+1.2
  Bottom Layer w0.152: v1(22.6,3.1) 23.6,4.1 v1(35.5,4.1)
IMD-: F_IMD-1.1 X_HV1.P$3 | length 20.1
  Top Layer w0.152: X_HV1.P$3 20.333,-0.3 v1(22.6,-0.3) ; v1(35.5,-4) F_IMD-1.1
  Bottom Layer w0.152: v1(22.6,-0.3) 26.3,-4 v1(35.5,-4)
IMD_FLT: X1.P$5 X2.P$2 | length 14.3
  Top Layer w0.152: X1.P$5@-53.7,0.9 -53.097,0.9 -52.538,1.459 -52.538,1.662 -51.2,3 -51.2,9.73 -49.204,11.726 -49.204,11.941 -48.646,12.5 X2.P$2
IP_ISO_1: CONN_ISO_1.P$3 XFMR1_1.2 | length 18.5
  Top Layer w0.152: XFMR1_1.2 27.34,18.27 CONN_ISO_1.P$3
IP_ISO_2: CONN_ISO_2.P$3 XFMR1_2.2 | length 20.9
  Top Layer w0.152: XFMR1_2.2 10.73,-15.73 16.5,-21.5 CONN_ISO_2.P$3
IPA_1: R_IPA1_1.2 UCOMM_1.11 X6_1.4 | length 7.5
  Top Layer w0.152: UCOMM_1.11 -9.301,16.849 -8.649,17.501 -8.524,17.501 -8.05,17.975 X6_1.4
  Top Layer w0.254: X6_1.4 -8.05,19.703 -8.023,19.73 -8.023,19.852 -7.775,20.1 R_IPA1_1.2
IPA_2: R_IPA1_2.2 UCOMM_2.11 X6_2.4 | length 8.3
  Top Layer w0.152: UCOMM_2.11 -11.951,-19.251 -8.739,-16.039 -8.214,-16.039 X6_2.4 -7.75,-15.575 R_IPA1_2.2
NetAIR_LED_A: AIR_LED.A R_AIR_LED.2 | length 1.4
  Top Layer w0.152: R_AIR_LED.2 AIR_LED.A
NetC_CAR_CANH1_1: C_CAR_CANH1.1 R_CAR_CANH1.2 | length 1.5
  Bottom Layer w0.152: R_CAR_CANH1.2 C_CAR_CANH1.1
NetC_CAR_CANH2_1: C_CAR_CANH2.1 R_CAR_CANH2.2 | length 1.5
  Bottom Layer w0.152: R_CAR_CANH2.2 C_CAR_CANH2.1
NetC_CAR_CANL1_1: C_CAR_CANL1.1 R_CAR_CANL1.2 | length 1.5
  Bottom Layer w0.152: R_CAR_CANL1.2 C_CAR_CANL1.1
NetC_CAR_CANL2_1: C_CAR_CANL2.1 R_CAR_CANL2.2 | length 1.5
  Bottom Layer w0.152: R_CAR_CANL2.2 C_CAR_CANL2.1
NetC_IPMA1_1_2: C_IPMA1_1.2 R_IMA1_1.1 R_IPA1_1.1 | length 6.2
  Top Layer w0.254: R_IMA1_1.1 v1(-6.25,17) R_IPA1_1.1
NetC_IPMA1_2_2: C_IPMA1_2.2 R_IMA1_2.1 R_IPA1_2.1 | length 6.4
  Top Layer w0.152: R_IMA1_2.1 v1(-6.25,-17) R_IPA1_2.1
NetGLED_1_K: GLED_1.K R_1.1 | length 1.3
  Top Layer w0.152: GLED_1.K R_1.1
NetGLED_2_K: GLED_2.K R_2.1 | length 1.3
  Top Layer w0.152: R_2.1 GLED_2.K
NetLED_BMSFLT1_A: LED_BMSFLT1.A R_BMSFLT1.1 | length 1.4
  Top Layer w0.152: R_BMSFLT1.1 LED_BMSFLT1.A
NetLED_DEBUG1_A: LED_DEBUG1.A R_DEBUG1.1 | length 1.4
  Top Layer w0.152: LED_DEBUG1.A R_DEBUG1.1
NetLED_DEBUG1_K: LED_DEBUG1.K U1.2 | length 3.2
  Top Layer w0.152: LED_DEBUG1.K U1.2
NetLED_DEBUG2_A: LED_DEBUG2.A R_DEBUG2.1 | length 1.3
  Top Layer w0.152: LED_DEBUG2.A R_DEBUG2.1
NetLED_DEBUG2_K: LED_DEBUG2.K U2.2 | length 3
  Top Layer w0.152: LED_DEBUG2.K@-35.049,-17.75 U2.2
NetNMOS_BMSFLT1_1: NMOS_BMSFLT1.1 U1.46 | length 10.7
  Top Layer w0.152: U1.46 -29.75,20.05 v1(-28.7,19)
  Bottom Layer w0.152: v1(-35.4,22.65) -32.184,19.434 -31.43,19.434 -30.997,19 v1(-28.7,19)
NetNMOS_BMSFLT2_1: NMOS_BMSFLT2.1 U2.46 | length 10.6
  Top Layer w0.152: U2.46 -29.75,-17.05 v1(-28.6,-18.2)
  Bottom Layer w0.152: v1(-35,-14.65) -32.084,-17.566 -31.43,-17.566 -30.797,-18.2 v1(-28.6,-18.2)
NetPRECHARGE_LED_A: PRECHARGE_LED.A R_PRECHARGE_LED.1 | length 1.5
  Top Layer w0.152: PRECHARGE_LED.A R_PRECHARGE_LED.1
NetR_DIST_1: R_DIST.1 RELAY_PRECHARGE_TIMING.10 | length 2.7
  Top Layer w0.152: R_DIST.1 -7.8,0.21 RELAY_PRECHARGE_TIMING.10
NetR_SET_1: R_SET.1 RELAY_PRECHARGE_TIMING.8 | length 2.7
  Top Layer w0.152: R_SET.1 -7.8,-4.87 RELAY_PRECHARGE_TIMING.8
NetX6_1_2: X6_1.2 XFMR1_1.4 | length 4.9
  Top Layer w0.254: X6_1.2 0.755,15.85 XFMR1_1.4
NetX6_1_3: X6_1.3 XFMR1_1.3 | length 4.9
  Top Layer w0.254: X6_1.3 0.705,18.1 XFMR1_1.3
NetX6_2_2: X6_2.2 XFMR1_2.4 | length 4.8
  Top Layer w0.152: X6_2.2 0.63,-18.125 XFMR1_2.4
NetX6_2_3: X6_2.3 XFMR1_2.3 | length 4.8
  Top Layer w0.152: X6_2.3 -3.805,-15.73 XFMR1_2.3
PRECHARGE: NMOS_PRECHARGE.1 PRECHARGE_LED_DRV.1 R_PU.1 U4.1 | length 28.9
  Top Layer w0.152: PRECHARGE_LED_DRV.1 -38,-3.45 -37.726,-3.724 -37.726,-3.824 -36.85,-4.7 -36.85,-5.25 -35.6,-6.5 -25.6,-6.5 -24.839,-5.739 -24.839,-5.524 -24.315,-5 NMOS_PRECHARGE.1 -23.861,-4.761 -22.861,-4.761 -22.2,-4.1 -15.105,-4.1 -14.939,-4.266 -14.939,-4.481 -14.716,-4.705 U4.1 -14.284,-4.705 -14.061,-4.929 -14.061,-5.144 -14.05,-5.155 R_PU.1
Precharge+: RELAY_PRECHARGE.7 X_HV1.P$5 | length 10
  Top Layer w0.152: RELAY_PRECHARGE.7 18.04,-10.16 19.997,-8.203 X_HV1.P$5
PRECHARGE_COMPLETE: PRECHARGE_LED.K PRECHARGE_LED_DRV.3 X3.P$3 | length 16.1
  Top Layer w0.152: X3.P$3 -45.75,-12.5 -40.074,-6.824 -40.074,-6.799 -39.775,-6.5 PRECHARGE_LED.K -40.049,-6.201 -40.199,-6.201 -40.8,-5.6 -40.8,-3.2 -40.474,-2.874 -40.474,-2.774 -40.2,-2.5 PRECHARGE_LED_DRV.3
PWR_IN: LDO_1.3 LDO_VDD1.3 R_BMSFLT1.2 X1.P$1 X2.P$1 | length 65.1
  Top Layer w0.152: v1(-61,-8.7) -61,-17.6 -59.5,-19.1 -54.5,-19.1 -48.95,-24.65 R_BMSFLT1.2
  Top Layer w0.254: v1(-54.6,-8.941) -54.6,-10.47 X1.P$1
  Bottom Layer w0.254: LDO_VDD1.3 v1(-61,-8.7) ; v1(-54.6,-8.941) -54.681,-8.941 -54.922,-8.7 v1(-61,-8.7) ; v1(-48.43,15.5) -59.3,4.63 LDO_1.3 -59.8,-2.1 -61,-3.3 v1(-61,-8.7)
RELAY-: NMOS_PRECHARGE.2 X3.P$2 | length 26.2
  Top Layer w0.152: X3.P$2 -47.795,-9.5 -47.236,-8.941 -47.236,-8.513 -39.523,-0.8 -33.4,-0.8 NMOS_PRECHARGE.2 -31.716,-2.7 NMOS_PRECHARGE.2@-34.814,-5.799
RESET1: R_RSTPU1.2 U1.7 X5.P$2 | length 15
  Top Layer w0.152: U1.7 -30.629,16.75 -30.1,17.279 v1(-30.1,17.9) ; v1(-27.7,23) -27.15,23 -25.999,24.151 -25.609,24.151 R_RSTPU1.2 X5.P$2
  Bottom Layer w0.152: v1(-30.1,17.9) -29.6,18.4 -28.552,18.4 -27.904,19.049 -27.904,22.687 -27.7,22.891 v1(-27.7,23)
RESET2: R_RSTPU2.2 U2.7 X7.P$2 | length 17.3
  Top Layer w0.152: U2.7 -30.35,-20.25 v1(-30.3,-20.3) ; R_RSTPU2.2 X7.P$2
  Bottom Layer w0.152: v1(-30.3,-20.3) -29.6,-20.3 -28,-18.7 -28,-12.54 X7.P$2
SWCLK1: U1.37 X5.P$4 | length 8.8
  Top Layer w0.152: U1.37 -24.9,21.1 v1(-24.7,21.3)
  Bottom Layer w0.152: X5.P$4 -30.4,27 v1(-24.7,21.3)
SWCLK2: U2.37 X7.P$4 | length 9.5
  Top Layer w0.152: X7.P$4 -29.384,-10 -28.405,-10.979 -27.221,-10.979 -26.2,-12 -26.2,-13.4 -25.25,-14.35 U2.37
SWDIO1: U1.34 X5.P$3 | length 12
  Top Layer w0.152: v1(-25.5,18.905) -25.379,18.905 -25.224,18.75 U1.34
  Bottom Layer w0.152: X5.P$3 -28,25.348 -24.171,21.519 -24.171,21.471 -24.1,21.4 -24.1,20.305 v1(-25.5,18.905)
SWDIO2: U2.34 X7.P$3 | length 16.2
  Top Layer w0.152: X7.P$3 -26.513,-8.513 -25.003,-8.513 -23.899,-9.617 -23.899,-11.115 -21.9,-13.114 -21.9,-17.47 -22.68,-18.25 U2.34
TIMING: C_TIMING.2 RELAY_PRECHARGE_TIMING.9 U4.3 | length 7.5
  Top Layer w0.152: U4.3 -14.321,-1.986 -13.586,-1.986 -13.1,-1.5 -11.05,-1.5 -10.732,-1.818 -10.732,-2.048 C_TIMING.2 -7.8,-2.33 RELAY_PRECHARGE_TIMING.9
V_TRIG: R_TRIG_B.2 R_TRIG_T.1 U4.2 | length 7.3
  Top Layer w0.152: U4.2 -15.529,-3.435 -16,-2.964 -16,-0.9 -14.872,0.228 -14.622,0.228 R_TRIG_T.1 R_TRIG_B.2
pads on no net: CONN_ISO_1.P$1 CONN_ISO_1.P$2 CONN_ISO_1.TAB1 CONN_ISO_1.TAB2 CONN_ISO_2.P$1 CONN_ISO_2.P$2 CONN_ISO_2.TAB1 CONN_ISO_2.TAB2 RELAY_PRECHARGE_TIMING.3 RELAY_PRECHARGE_TIMING.4 RELAY_PRECHARGE_TIMING.5 U1.3 U1.4 U1.5 U1.6 U1.10 U1.11 U1.12 U1.13 U1.21 U1.22 U1.25 U1.26 U1.27 U1.28 U1.29 U1.30 U1.31 U1.38 U1.40 U1.42 U1.43 U1.45 U2.3 U2.4 U2.5 U2.10 U2.11 U2.12 U2.13 U2.18 U2.19 U2.21 U2.22 U2.25 U2.26 U2.27 U2.28 U2.29 U2.30 U2.31 U2.38 U2.40 U2.42 U2.43 U2.45 U4.5 U4.6 U4.7 X1.TAB1 X1.TAB2 X2.TAB1 X2.TAB2 X3.TAB1 X3.TAB2 X4.TAB1 X4.TAB2 X_HV1.TAB1 X_HV1.TAB2

## Polygon pours and split planes (outlines as drawn)
GND on Bottom Layer (solid, remove dead copper, pour order 0): -64.9,31.5 5,31.5 5,-31.5 -64.9,-31.5

## Keep-outs
Keep-Out Layer:
  the board outline again, w0.152

## Silkscreen, mask and mechanical layers (free items; w line width, h text height)
Top Overlay:
  lines w0.152: 5,-31.5 5,31.5 ; 18,-31.5 18,31.5
  text "3V3" at -43.7,27.8 h1.5
  text "5V" at -52.2,27.7 h1.5
  text "Chaitanya Sindagi" at -64.4,17.5 h2.2 r270
  text "AIR" at -42.1,2 h1.5
  text "PC" at -40.5,-9.3 h1.5
  text "FAULT" at -45.7,-26.6 h1.5
  text "Illini Formula Electic - Apollo 2019" at -50,-30.2 h1

## Text inside footprints (layer, text, board x,y; h text height)
UCOMM_1: Top Overlay "*" at -17.184,19.351 h1.97
UCOMM_2: Top Overlay "*" at -17.184,-16.749 h1.97